# EAGLE board powerboard (EAGLE 5.11)
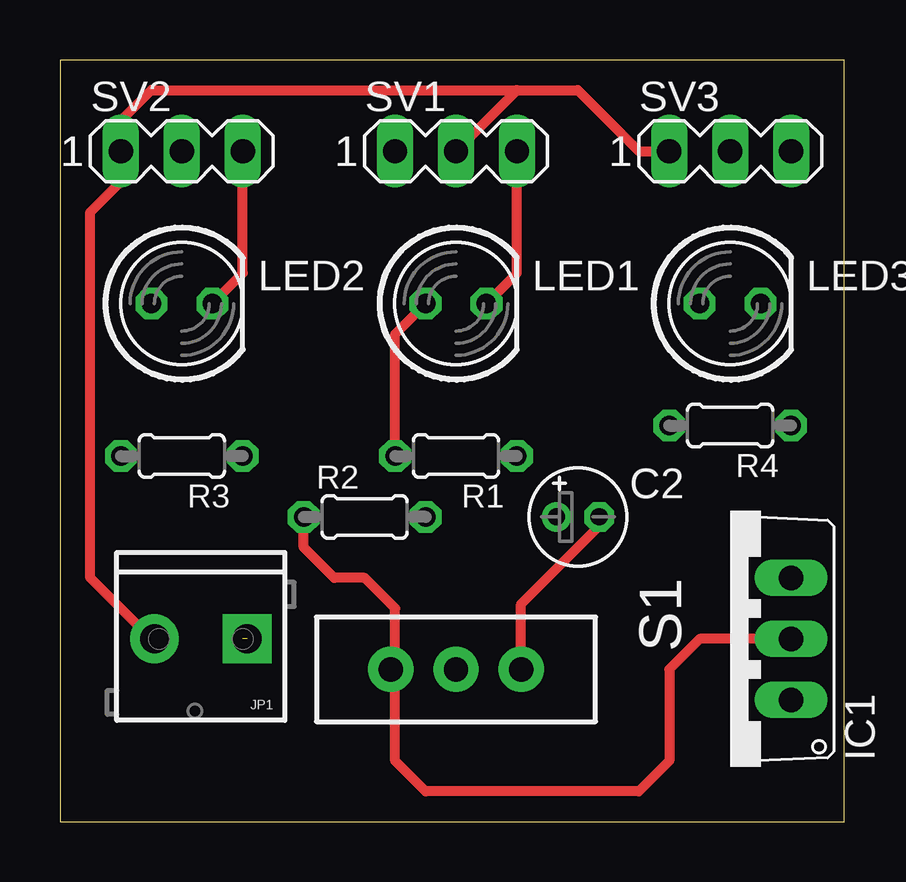
[diagram p0: board, top side]
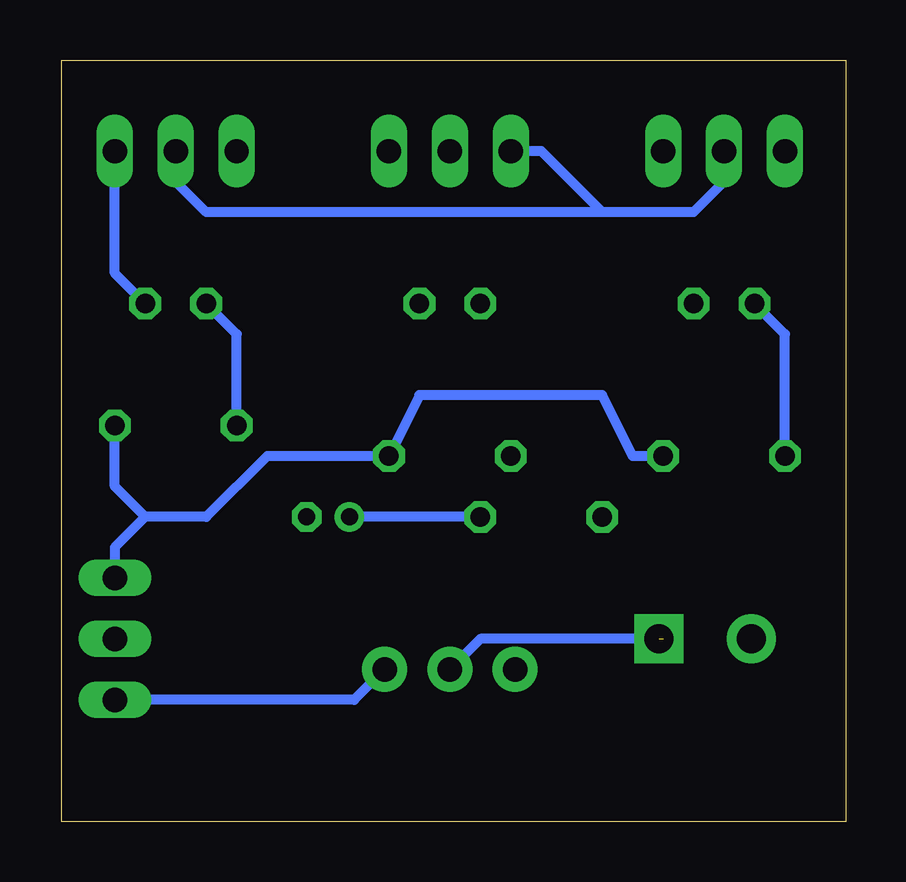
[diagram p1: board, bottom side, seen from below]

Size 32.69 x 31.74 mm. Coordinates in mm from the lower left corner, seen from the top.
Outline: 0,0 32.69,0 32.69,31.74 0,31.74 0,0
Copper layers (1*16): Top 0.035mm / dielectric 1.5mm / Bottom 0.035mm
Design rules "default": minimum track width 10mil, minimum drill 24mil, track to track 8mil, track to pad 8mil, pad to pad 8mil, via to via 8mil, smd to smd 8mil, copper to edge 40mil, drill to drill 8mil, minimum pad ring 10mil, minimum via ring 8mil, stop-mask expansion 4mil, vias tented up to drill 0mil, thermal gap 10mil

## Footprints (pad centres in the part's own frame; a part is rotated, then mirrored left to right if it is on the bottom)
E1,8-4 = drill 0.711 pad 1.168 round: + -0.889,0 | drill 0.711 pad 1.168 octagon: - 0.889,0
TO220V = drill 1.016 long: 1 -2.54,-2.54; 2 0,-2.54; 3 2.54,-2.54
SCREWTERMINAL-3.5MM-2_LOCK = drill 1.2 pad 2.032 square: 1 -0.178,0 | drill 1.2 pad 2.032 round: 2 3.678,0
LED5MM = drill 0.813 octagon: A -1.27,0; K 1.27,0
0204/5 = drill 0.813 octagon: 1 -2.54,0; 2 2.54,0
SWITCH-SPDT_LOCK.007S = drill 1.016 pad 1.88 round: 1 0,2.718; 2 0,0; 3 0,-2.718
MA03-1 = drill 1.016 long: 1 -2.54,0; 2 0,0; 3 2.54,0

## Placement (x,y rotation side)
C2  100nF  [E1,8-4]  21.59,12.7 0 top
IC1  7805TV  [TO220V]  27.94,7.62 90 top
JP1  [SCREWTERMINAL-3.5MM-2_LOCK]  7.62,7.62 180 top
LED1  [LED5MM]  16.51,21.59 0 top
LED2  [LED5MM]  5.08,21.59 0 top
LED3  [LED5MM]  27.94,21.59 0 top
R1  330  [0204/5]  16.51,15.24 180 top
R2  15M  [0204/5]  12.7,12.7 0 top
R3  330  [0204/5]  5.08,15.24 180 top
R4  330  [0204/5]  27.94,16.51 180 top
S1  [SWITCH-SPDT_LOCK.007S]  16.51,6.35 270 top
SV1  [MA03-1]  16.51,27.94 0 top
SV2  [MA03-1]  5.08,27.94 0 top
SV3  [MA03-1]  27.94,27.94 0 top

## Library data of the parts
C2 = rcl
IC1 = linear
JP1 S1 = SparkFun
LED1-LED3 = led
R1-R4 = resistor
SV1-SV3 = con-lstb; OC_FARNELL: unknown; OC_NEWARK: unknown

## Nets
GND: IC1.2 R2.1 S1.3
N$1: JP1.2 SV1.2 SV2.1 SV3.1
N$2: C2.- IC1.1 S1.1
N$3: LED2.K SV2.3
N$4: JP1.1 S1.2
N$5: LED1.K SV1.3
N$6: LED3.K SV3.3
N$7: SV1.1 SV2.2 SV3.2
N$8: LED3.A R4.2
N$9: LED2.A R3.2
N$10: C2.+ R2.2
N$11: LED1.A R1.2
N$12: IC1.3 R1.1 R3.1 R4.1

## Tracks (layer width: path | path; a pad name or v marks a point on that pad's centre or on a via)
GND
  Top 0.406: R2.1 10.16,11.43 11.43,10.16 12.7,10.16 13.97,8.89 13.97,6.53 S1.3 13.97,6.17 13.97,2.54 15.24,1.27 24.13,1.27 25.4,2.54 25.4,6.35 26.67,7.62 IC1.2
N$1
  Top 0.406: 19.05,30.48 3.81,30.48 2.54,29.21 SV2.1 2.54,26.67 1.27,25.4 1.27,10.16 3.81,7.62 JP1.2 | 19.05,30.48 21.59,30.48 24.13,27.94 SV3.1 | 19.05,30.48 SV1.2
N$2
  Top 0.406: S1.1 19.23,9.07 22.48,12.32 C2.-
  Bottom 0.406: IC1.1 20.5,5.08 S1.1
N$3
  Top 0.406: SV2.3 7.62,22.86 LED2.K
N$4  (1 unrouted)
  Bottom 0.406: 7.62,7.62 15.24,7.62 S1.2
N$5
  Top 0.406: SV1.3 19.05,22.86 LED1.K
N$6
  Bottom 0.406: LED3.K 30.48,22.86 SV3.3
N$7
  Bottom 0.406: 10.16,25.4 26.67,25.4 27.94,26.67 SV3.2 | 10.16,25.4 12.7,27.94 SV1.1 | SV2.2 5.08,26.67 6.35,25.4 10.16,25.4
N$8
  Bottom 0.406: R4.2 25.4,20.32 LED3.A
N$9
  Bottom 0.406: R3.2 2.54,20.32 LED2.A
N$10
  Bottom 0.406: R2.2 C2.+
N$11
  Top 0.406: R1.2 13.97,20.32 LED1.A
N$12
  Bottom 0.406: R3.1 8.89,15.24 10.16,17.78 17.78,17.78 R1.1 24.13,15.24 26.67,12.7 29.21,12.7 | 29.21,12.7 30.48,11.43 IC1.3 | 29.21,12.7 30.48,13.97 R4.1